# EAGLE board guitar tuner main board (EAGLE 6.5.0)
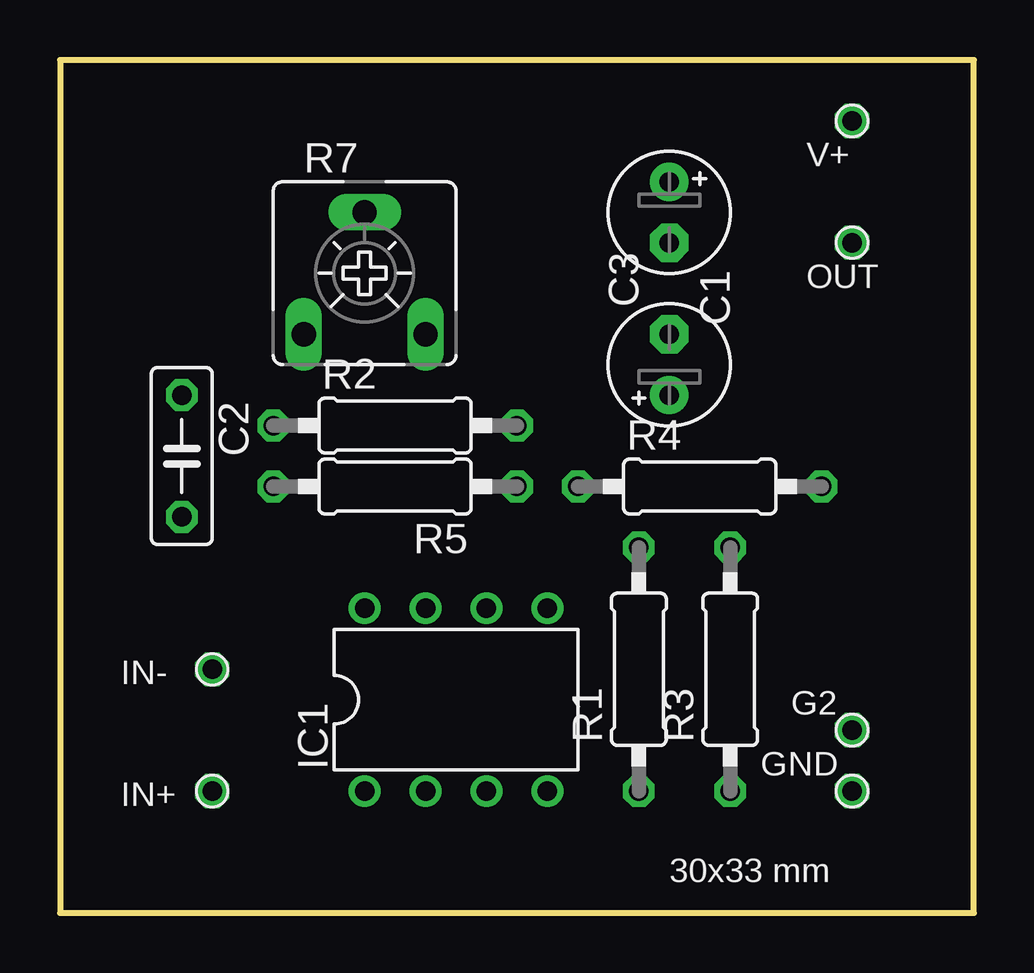
[diagram p0: board, top side]
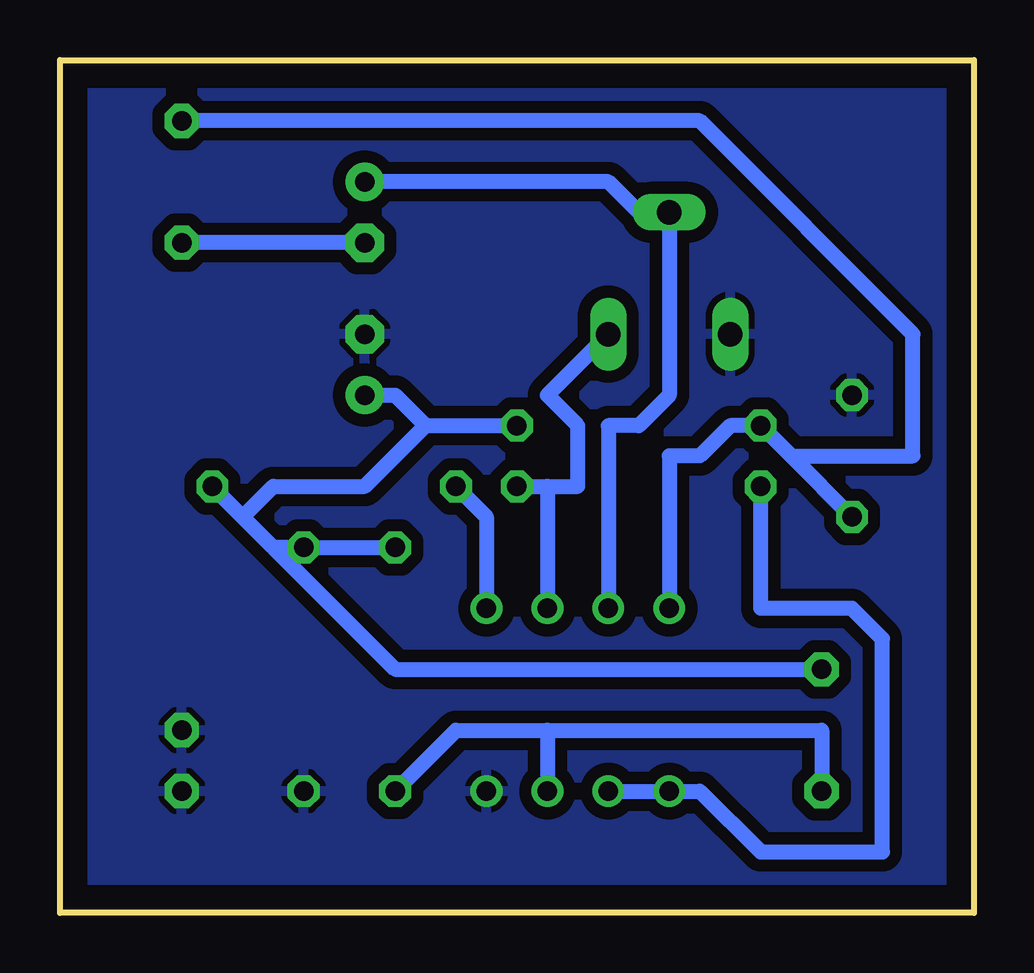
[diagram p1: board, bottom side, seen from below]

Size 38.1 x 35.56 mm. Coordinates in mm from the lower left corner, seen from the top.
Outline: 0,0 38.1,0 38.1,35.56 0,35.56 0,0
Copper layers (1*16): Top 0.035mm / dielectric 1.5mm / Bottom 0.035mm
Design rules "default": minimum track width 10mil, minimum drill 24mil, track to track 8mil, track to pad 8mil, pad to pad 8mil, via to via 8mil, smd to smd 8mil, copper to edge 40mil, drill to drill 8mil, minimum pad ring 10mil, minimum via ring 8mil, stop-mask expansion 4mil, vias tented up to drill 0mil, thermal gap 10mil
Net classes: 0 default: width 0.635 mm, drill 0.178 mm, clearance 0.508 mm

## Footprints (pad centres in the part's own frame; a part is rotated, then mirrored left to right if it is on the bottom)
E2,5-5 = drill 0.813 pad 1.6: + -1.27,0 | drill 0.813 pad 1.6 octagon: - 1.27,0
C050-025X075 = drill 0.813 octagon: 1 -2.54,0; 2 2.54,0
PAD146 = drill 0.813 pad 1.422 octagon: 1 0,0
DIL08 = drill 0.813 pad 1.27: 1 -3.81,-3.81; 2 -1.27,-3.81; 3 1.27,-3.81; 4 3.81,-3.81; 5 3.81,3.81; 6 1.27,3.81; 7 -1.27,3.81; 8 -3.81,3.81
0207/10 = drill 0.813 octagon: 1 -5.08,0; 2 5.08,0
CA6V = drill 1.016 long: A -2.54,-2.54; E 2.54,-2.54; S 0,2.54

## Placement (x,y rotation side)
C1  10u  [E2,5-5]  25.4,29.21 270 top
C2  100n  [C050-025X075]  5.08,19.05 270 top
C3  10u  [E2,5-5]  25.4,22.86 90 top
G2  [PAD146]  33.02,7.62 0 top
GND  [PAD146]  33.02,5.08 0 top
IC1  TLC272  [DIL08]  16.51,8.89 0 top
IN+  [PAD146]  6.35,5.08 0 top
IN-  [PAD146]  6.35,10.16 0 top
OUT  [PAD146]  33.02,27.94 0 top
R1  10K..10M  [0207/10]  24.13,10.16 90 top
R2  150K  [0207/10]  13.97,20.32 0 top
R3  100K  [0207/10]  27.94,10.16 90 top
R4  1K  [0207/10]  26.67,17.78 0 top
R5  1K  [0207/10]  13.97,17.78 180 top
R7  [CA6V]  12.7,26.67 0 top
V+  [PAD146]  33.02,33.02 0 top

## Library data of the parts
C1-C3 R1-R5 = rcl
G2 GND IN+ IN- OUT V+ = 2martin
IC1 = linear
R7 = pot

## Nets
GND: C2.1 C3.- G2.1 GND.1 IC1.4 R3.1 R7.A
N$2: IC1.6 R5.1 R7.E
N$3: C1.- OUT.1
N$5: IC1.5 R4.1
N$6: C1.+ IC1.7 R7.S
N$14: IC1.1 IC1.2 R5.2
N$15: IC1.3 IN+.1 R1.1
N$20: C3.+ IN-.1 R1.2 R2.2 R3.2 R4.2
V9V: C2.2 IC1.8 R2.1 V+.1

## Tracks (layer width: path | path; a pad name or v marks a point on that pad's centre or on a via)
GND
  pour Bottom: 0,35.56 38.1,35.56 38.1,0 0,0
N$2
  Bottom 0.635: 17.78,17.78 IC1.6 | R5.1 17.78,17.78 | R7.E 17.78,21.59 16.51,20.32 16.51,17.78 17.78,17.78
N$3
  Bottom 0.635: C1.- OUT.1
N$5
  Bottom 0.635: IC1.5 20.32,16.51 R4.1
N$6
  Bottom 0.635: IC1.7 15.24,20.32 13.97,20.32 12.7,21.59 R7.S 13.97,29.21 15.24,30.48 C1.+
N$14
  Bottom 0.635: IC1.2 IC1.1 11.43,5.08 8.89,2.54 3.81,2.54 3.81,11.43 5.08,12.7 8.89,12.7 R5.2
N$15
  Bottom 0.635: 17.78,7.62 IC1.3 | 17.78,7.62 21.59,7.62 R1.1 | IN+.1 6.35,7.62 17.78,7.62
N$20
  Bottom 0.635: 22.86,20.32 R2.2 | 22.86,20.32 24.13,21.59 C3.+ | R1.2 R3.2 29.21,15.24 | 29.21,15.24 30.48,16.51 | 30.48,16.51 R4.2 | IN-.1 24.13,10.16 29.21,15.24 | 22.86,20.32 25.4,17.78 29.21,17.78 30.48,16.51
V9V
  Bottom 0.635: 7.62,19.05 R2.1 10.16,20.32 11.43,19.05 12.7,19.05 IC1.8 | 7.62,19.05 C2.2 | V+.1 11.43,33.02 2.54,24.13 2.54,19.05 7.62,19.05

## Text on the board
tPlace: 30x33 mm